# EAGLE board Z05_C8V_B_01 (EAGLE 6.3)

Size 98.73 x 80 mm. Coordinates in mm from the lower left corner, seen from the top.
Outline: 0,0 98.73,0 98.73,80 0,80 0,0
Copper layers (1*16): Top 0.035mm / dielectric 1.5mm / Bottom 0.035mm
Design rules "default": minimum track width 10mil, minimum drill 24mil, track to track 8mil, track to pad 8mil, pad to pad 8mil, via to via 8mil, smd to smd 8mil, copper to edge 40mil, drill to drill 8mil, minimum pad ring 10mil, minimum via ring 8mil, stop-mask expansion 4mil, vias tented up to drill 0mil, thermal gap 10mil

## Footprints (pad centres in the part's own frame; a part is rotated, then mirrored left to right if it is on the bottom)
GSH15 = drill 1.321 pad 2.54 long: 1 -7.62,0; 2 7.62,0 | hole 2.794: 0,0
DIL16 = drill 0.813 long: 1 -8.89,-3.81; 2 -6.35,-3.81; 3 -3.81,-3.81; 4 -1.27,-3.81; 5 1.27,-3.81; 6 3.81,-3.81; 7 6.35,-3.81; 8 8.89,-3.81; 9 8.89,3.81; 10 6.35,3.81; 11 3.81,3.81; 12 1.27,3.81; 13 -1.27,3.81; 14 -3.81,3.81; 15 -6.35,3.81; 16 -8.89,3.81
G2R2A = drill 1.321 long: 1 -2.54,-3.683; 2 -2.54,3.81; P1 17.45,3.81; P2 17.45,-3.683; S1 22.454,3.81; S2 22.454,-3.683
TO126AV = drill 1.016 long: B 2.286,-1.27; C 0,-1.27; E -2.286,-1.27
0204/7 = drill 0.813 octagon: 1 -3.81,0; 2 3.81,0
FE08W = drill 0.813 long: 1 -8.89,0; 2 -6.35,0; 3 -3.81,0; 4 -1.27,0; 5 1.27,0; 6 3.81,0; 7 6.35,0; 8 8.89,0
EI42-1 = drill 1.118 pad 3.81 octagon: 1 -12.497,12.497; 5 -12.497,-12.497 | drill 1.118 pad 3.175 octagon: 6 12.497,-12.497; 7 12.497,-7.493; 9 12.497,7.493; 10 12.497,12.497
AK300/2 = drill 1.321 long: 1 -2.515,0; 2 2.489,0

## Placement (x,y rotation side)
F1  [GSH15]  26.67,6.35 0 top
IC1  74LS138N  [DIL16]  20.32,68.58 0 top
K1  G2R2A  [G2R2A]  46.99,54.61 90 top
K2  G2R2A  [G2R2A]  60.96,54.61 90 top
K3  G2R2A  [G2R2A]  74.93,54.61 90 top
K4  G2R2A  [G2R2A]  88.9,54.61 90 top
K5  G2R2A  [G2R2A]  -73.66,87.63 0 top  (outside the outline)
K6  G2R2A  [G2R2A]  -40.64,101.6 0 top  (outside the outline)
K7  G2R2A  [G2R2A]  -73.66,101.6 0 top  (outside the outline)
K8  G2R2A  [G2R2A]  48.26,6.35 90 top
Q1  BD139  [TO126AV]  -43.18,129.54 0 top  (outside the outline)
Q2  BD139  [TO126AV]  -52.07,129.54 0 top  (outside the outline)
Q3  BD139  [TO126AV]  -60.96,129.54 0 top  (outside the outline)
Q4  BD139  [TO126AV]  -69.85,129.54 0 top  (outside the outline)
Q5  BD139  [TO126AV]  -78.74,129.54 0 top  (outside the outline)
Q6  BD139  [TO126AV]  -87.63,129.54 0 top  (outside the outline)
Q7  BD139  [TO126AV]  -96.52,129.54 0 top  (outside the outline)
Q8  BD139  [TO126AV]  -105.41,129.54 0 top  (outside the outline)
R1  [0204/7]  -17.78,134.62 0 top  (outside the outline)
R2  [0204/7]  -27.94,134.62 0 top  (outside the outline)
R3  [0204/7]  -38.1,134.62 0 top  (outside the outline)
R4  [0204/7]  -48.26,134.62 0 top  (outside the outline)
R5  [0204/7]  -58.42,134.62 0 top  (outside the outline)
R6  [0204/7]  -68.58,134.62 0 top  (outside the outline)
R7  [0204/7]  -78.74,134.62 0 top  (outside the outline)
R8  [0204/7]  -88.9,134.62 0 top  (outside the outline)
SV1  [FE08W]  -55.88,111.76 0 top  (outside the outline)
TR1  [EI42-1]  20.32,35.56 0 top
X1  [AK300/2]  -59.69,6.35 0 top  (outside the outline)
X2  [AK300/2]  -71.12,6.35 0 top  (outside the outline)
X3  [AK300/2]  -82.55,6.35 0 top  (outside the outline)
X4  [AK300/2]  -93.98,6.35 0 top  (outside the outline)
X5  [AK300/2]  -19.05,57.15 0 top  (outside the outline)
X6  [AK300/2]  -30.48,57.15 0 top  (outside the outline)
X7  [AK300/2]  -41.91,57.15 0 top  (outside the outline)
X8  [AK300/2]  -53.34,57.15 0 top  (outside the outline)
X9  [AK300/2]  -64.77,57.15 0 top  (outside the outline)

## Library data of the parts
F1 = fuse; MPN: 64900001039; OC_FARNELL: 1271673; OC_NEWARK: 02P0318
IC1 = 74xx-eu
K1-K8 = relay; MPN: G2R-2A-DC24; OC_FARNELL: 6985269; OC_NEWARK: 36M5257
Q1-Q8 = transistor-power
R1-R8 = rcl
SV1 = con-lsta; OC_FARNELL: unknown; OC_NEWARK: unknown
TR1 = trafo
X1-X9 = con-ptr500; OC_FARNELL: unknown; OC_NEWARK: unknown

## Nets
+5V: K1.1 K2.1 K8.1 SV1.8
GND: IC1.8 Q1.E Q8.E SV1.7
GND1: Q2.E
GND2: Q3.E
GND3: Q4.E
GND4: Q5.E
GND5: Q6.E
GND6: Q7.E
N$1: K1.S2 K2.S2 K8.S2 TR1.9
N$2: K1.S1 K8.S1 TR1.7
N$3: Q1.B R1.2
N$4: IC1.15 R1.1
N$5: K1.2 Q1.C
N$8: Q2.B R2.2
N$9: K2.2 Q2.C
N$12: Q3.B R3.2
N$13: K3.2 Q3.C
N$16: Q4.B R4.2
N$17: K4.2 Q4.C
N$20: Q5.B R5.2
N$21: K5.2 Q5.C
N$24: Q6.B R6.2
N$25: K6.2 Q6.C
N$27: IC1.14 R2.1
N$28: Q7.B R7.2
N$29: K7.2 Q7.C
N$30: IC1.13 R3.1
N$31: IC1.12 R4.1
N$32: Q8.B R8.2
N$33: K8.2 Q8.C
N$34: IC1.11 R5.1
N$35: IC1.10 R6.1
N$36: IC1.9 R7.1
N$37: IC1.7 R8.1
N$38: K1.P2 X1.2
N$39: K1.P1 K2.P1 K3.P1 K4.P1 K5.P1 K6.P1 K7.P1 K8.P1 X1.1 X2.1 X3.1 X4.1 X5.1 X6.1 X7.1 X8.1
N$40: F1.1 X9.1
N$41: F1.2 TR1.1
N$42: IC1.1 SV1.6
N$43: IC1.2 SV1.5
N$44: IC1.3 SV1.4
N$45: IC1.6 SV1.3
N$46: IC1.4 SV1.2
N$47: IC1.5 SV1.1
N$48: TR1.5 X9.2
VCC: IC1.16

## Tracks (layer width: path | path; a pad name or v marks a point on that pad's centre or on a via)
+5V  (3 unrouted)
GND  (3 unrouted)
N$1  (3 unrouted)
N$2  (2 unrouted)
N$3  (1 unrouted)
N$4  (1 unrouted)
N$5  (1 unrouted)
N$8  (1 unrouted)
N$9  (1 unrouted)
N$12  (1 unrouted)
N$13  (1 unrouted)
N$16  (1 unrouted)
N$17  (1 unrouted)
N$20  (1 unrouted)
N$21  (1 unrouted)
N$24  (1 unrouted)
N$25  (1 unrouted)
N$27  (1 unrouted)
N$28  (1 unrouted)
N$29  (1 unrouted)
N$30  (1 unrouted)
N$31  (1 unrouted)
N$32  (1 unrouted)
N$33  (1 unrouted)
N$34  (1 unrouted)
N$35  (1 unrouted)
N$36  (1 unrouted)
N$37  (1 unrouted)
N$38  (1 unrouted)
N$39  (15 unrouted)
N$40  (1 unrouted)
N$41  (1 unrouted)
N$42  (1 unrouted)
N$43  (1 unrouted)
N$44  (1 unrouted)
N$45  (1 unrouted)
N$46  (1 unrouted)
N$47  (1 unrouted)
N$48  (1 unrouted)